# EAGLE board PCB (EAGLE 9.7.0)
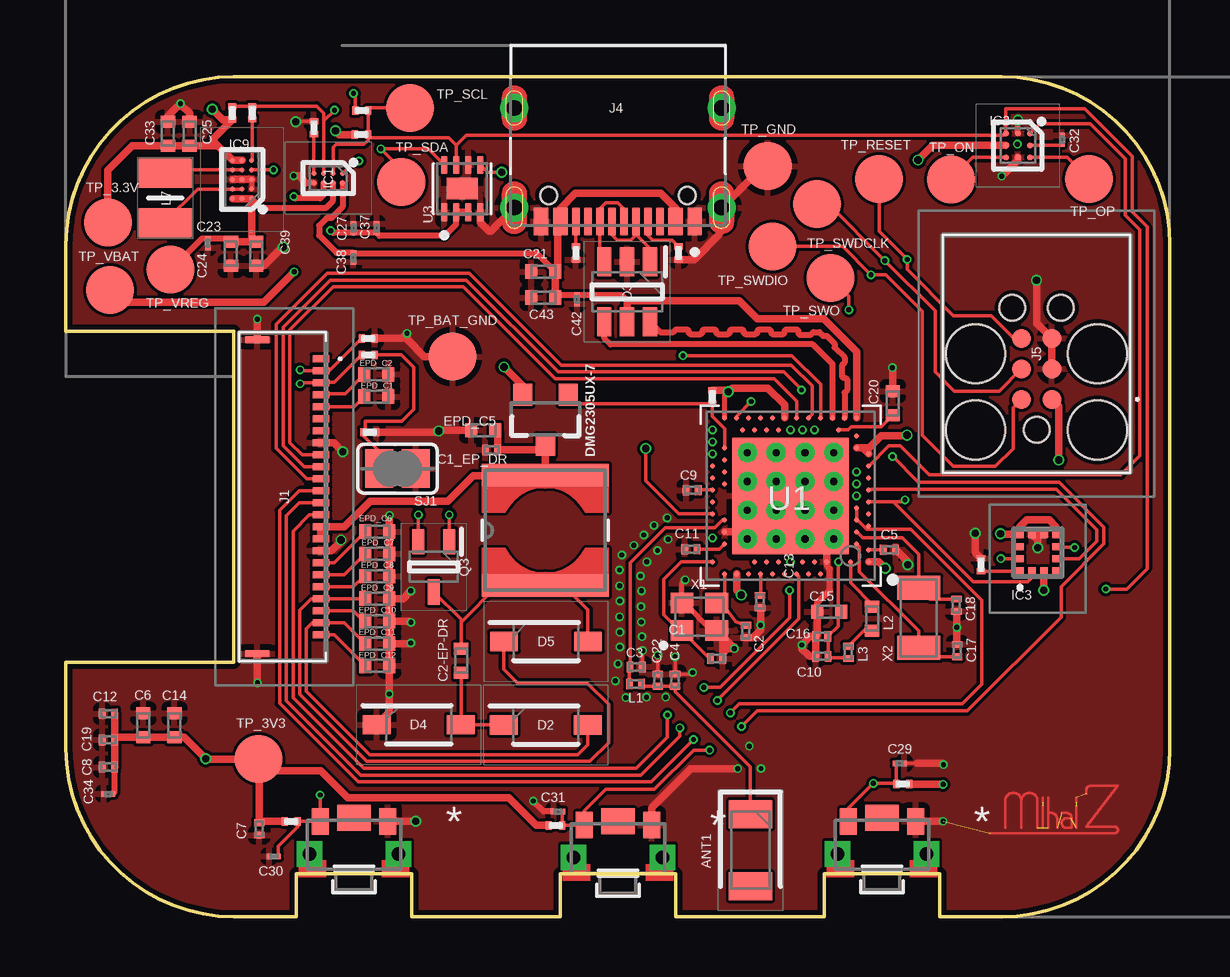
[diagram p0: board, top side]
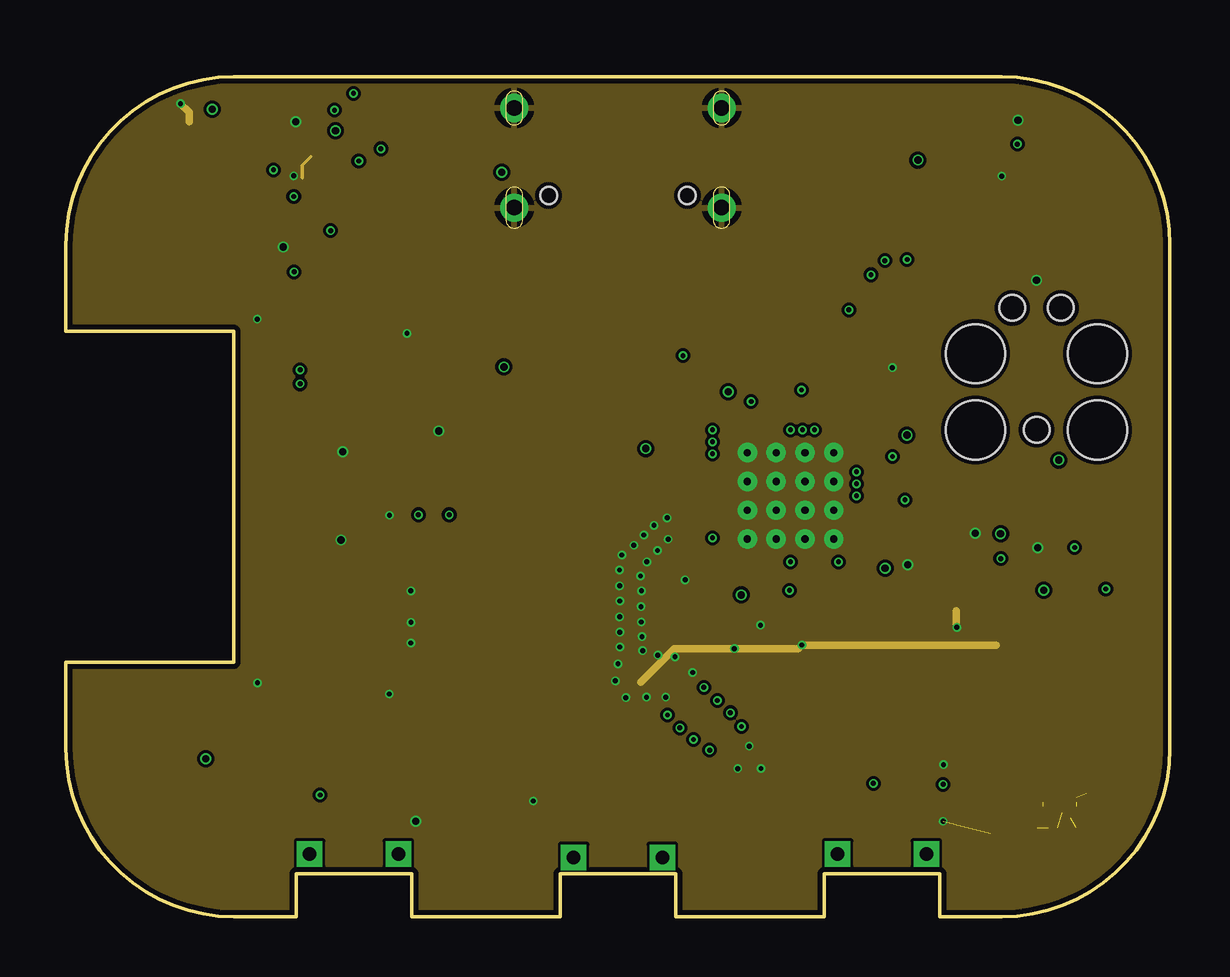
[diagram p1: board, inner layer Route2]
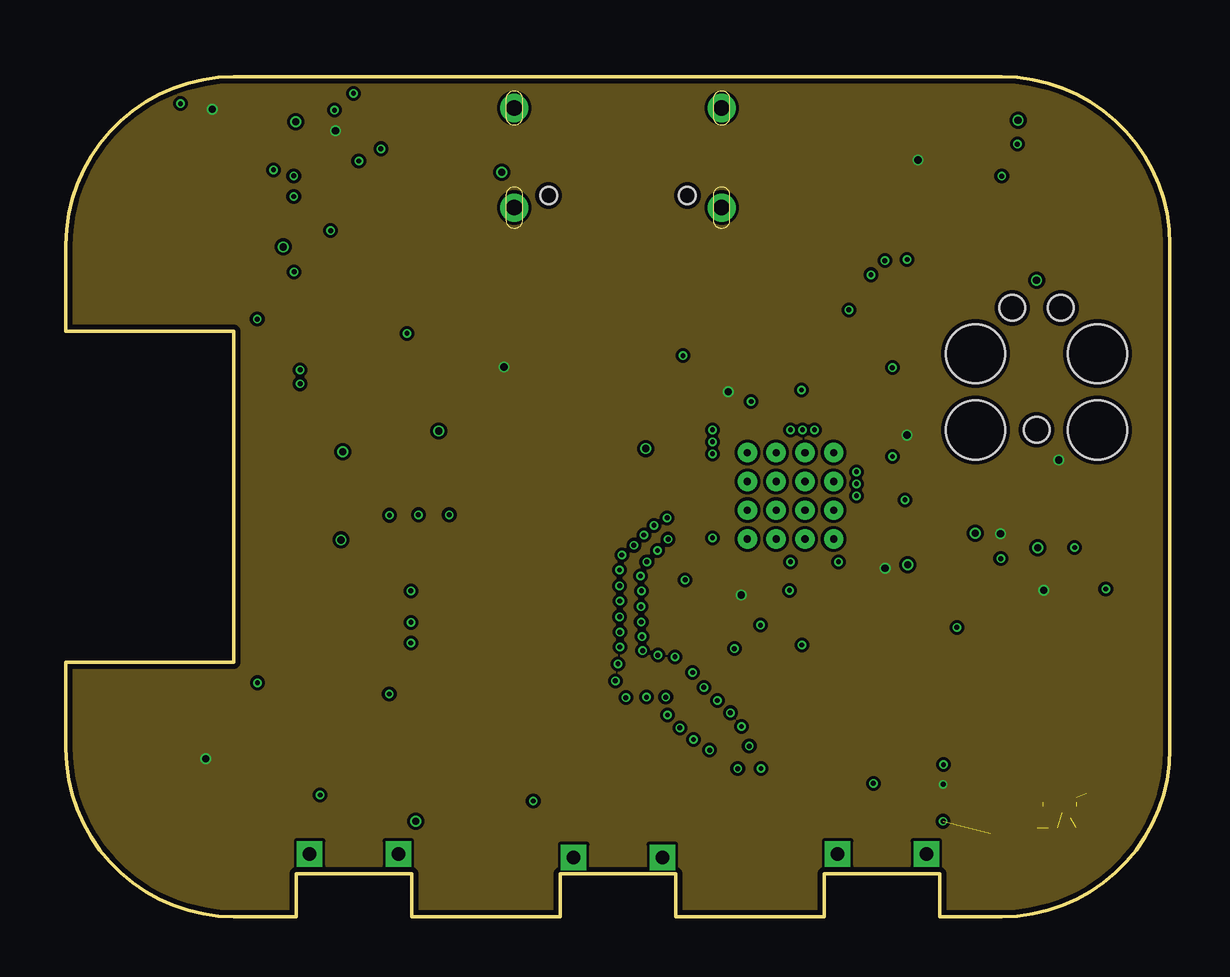
[diagram p2: board, inner layer Route15]
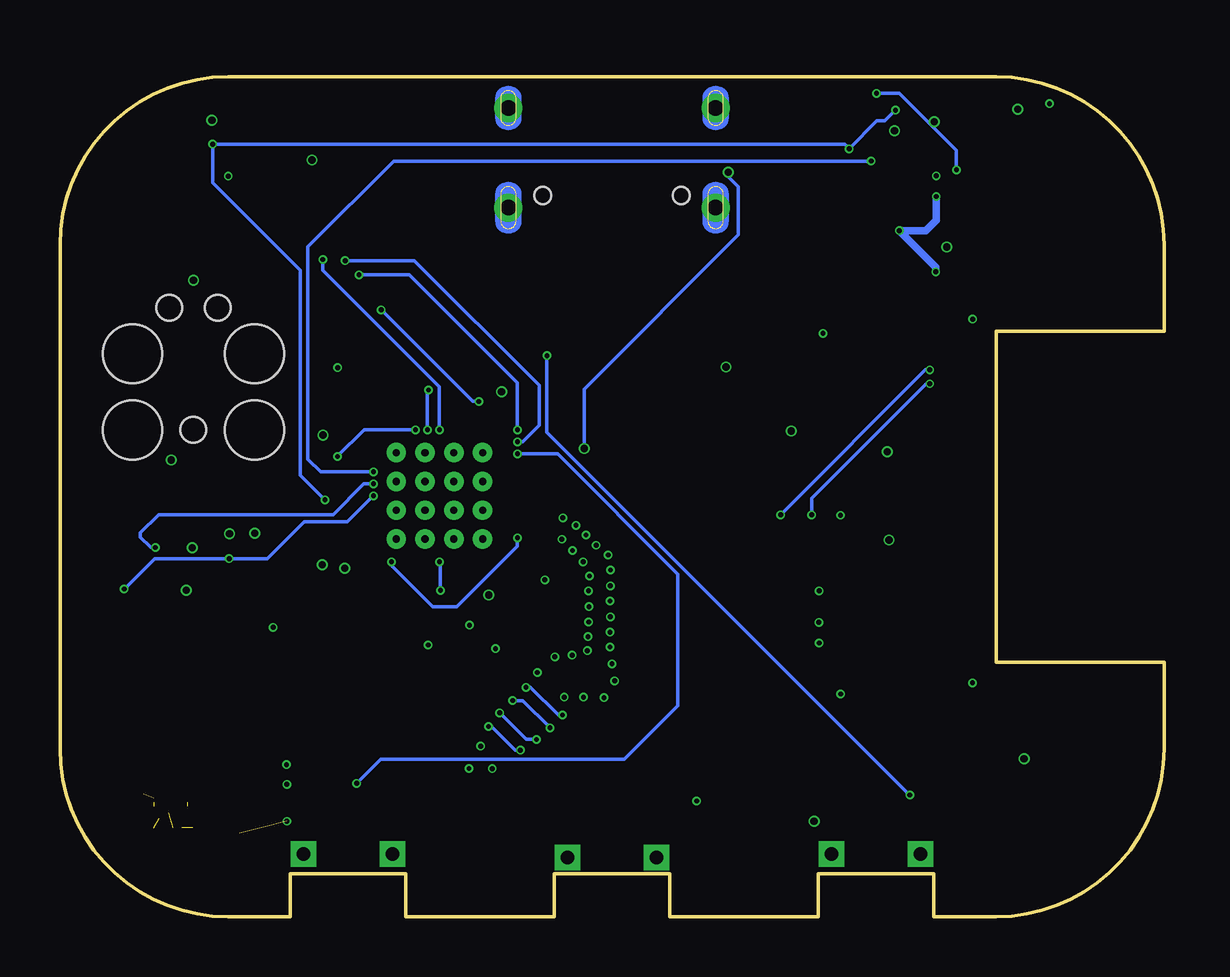
[diagram p3: board, bottom side, seen from below]

Size 46 x 35 mm. Coordinates in mm from the lower left corner, seen from the top.
Outline: 39,0 36.4,0 36.4,1.8 31.6,1.8 31.6,0 25.4,0 25.4,1.8 20.6,1.8 20.6,0 14.4,0 14.4,1.8 9.6,1.8 9.6,0 7,0 arc-90 0,7 0,10.6 7,10.6 7,24.4 0,24.4 0,28 arc-90 7,35 39,35 arc-90 46,28 46,7 arc-90 39,0
Copper layers (1+2*15+16): Top 0.035mm / dielectric 1.6mm / Route2 0.035mm / dielectric 0.15mm / Route15 0.035mm / dielectric 0.2mm / Bottom 0.035mm
Design rules "jlcpcb-2layers.dru *": minimum track width 5mil, minimum drill 0.2mm, track to track 5mil, track to pad 5mil, pad to pad 5mil, via to via 5mil, smd to smd 5mil, copper to edge 0.2mm, drill to drill 6mil, minimum pad ring 10mil, minimum via ring 3mil, stop-mask expansion 4mil, vias tented up to drill 999mm, thermal gap 10mil

## Footprints (pad centres in the part's own frame; a part is rotated, then mirrored left to right if it is on the bottom)
2450AT18B100E_ANTC3216X140N = smd 1.15 x 1.8: 1 -1.5,0; 2 1.5,0
NORDIC_NRF_3_RESC0201_L = smd 0.28 x 0.43: 1 -0.255,0; 2 0.255,0
NORDIC_NRF_3_RESC0402_L = smd 0.5 x 0.6: 1 -0.5,0; 2 0.5,0
GRM011R60J152KE01L_2_CAPC0201X13N = smd 0.22 x 0.23: 1 -0.185,0; 2 0.185,0
ESP32_C6_LIBRARY_5_SOD3716X135N = smd 1.15 x 0.8: 1 -1.75,0; 2 1.75,0
ESP32_C6_LIBRARY_3_SOT95P280X145-6N = smd 1.2 x 0.6: 1 -1.25,0.95; 2 -1.25,0; 3 -1.25,-0.95; 4 1.25,-0.95; 5 1.25,0; 6 1.25,0.95
ESP32_C6_LIBRARY_4_ESP32_C6_LIBRARY_4_ESP32_C6_LIBRARY_4_ESP32_C6_LIBRARY_4_ESP32_WROVER_SPARKFUN-DISCRETESEMI_SOT23-3 = smd 0.8 x 0.9: 1 -0.95,-1; 2 0.95,-1; 3 0,1.1
BQ25180YBGR_BGA8C40P2X4_100X155X50 = smd 0.2 x 0.2: A1 -0.2,0.6; A2 0.2,0.6; B1 -0.2,0.2; B2 0.2,0.2; C1 -0.2,-0.2; C2 0.2,-0.2; D1 -0.2,-0.6; D2 0.2,-0.6
DRV2605YZFR_BGA9C50P3X3_144X144X62 = smd 0.25 x 0.25: A1 -0.5,0.5; A2 0,0.5; A3 0.5,0.5; B1 -0.5,0; B2 0,0; B3 0.5,0; C1 -0.5,-0.5; C2 0,-0.5; C3 0.5,-0.5
BMA423_BMA423 = smd 0.3 x 0.35: 1 -0.75,-0.775; 2 -0.25,-0.775; 3 0.25,-0.775; 4 0.75,-0.775; 7 0.75,0.775; 8 0.25,0.775; 9 -0.25,0.775; 10 -0.75,0.775 | smd 0.35 x 0.3: 5 0.775,-0.25; 6 0.775,0.25; 11 -0.775,0.25; 12 -0.775,-0.25
RT6160AWSC_BGA15C40P3X5_140X230X60 = smd 0.216 x 0.216: A1 -0.4,0.8; A2 0,0.8; A3 0.4,0.8; B1 -0.4,0.4; B2 0,0.4; B3 0.4,0.4; C1 -0.4,0; C2 0,0; C3 0.4,0; D1 -0.4,-0.4; D2 0,-0.4; D3 0.4,-0.4; E1 -0.4,-0.8; E2 0,-0.8; E3 0.4,-0.8
503480-2400_5034802400 = smd 0.3 x 0.7: 1 -5.75,1.525; 2 -5.25,1.525; 3 -4.75,1.525; 4 -4.25,1.525; 5 -3.75,1.525; 6 -3.25,1.525; 7 -2.75,1.525; 8 -2.25,1.525; 9 -1.75,1.525; 10 -1.25,1.525; 11 -0.75,1.525; 12 -0.25,1.525; 13 0.25,1.525; 14 0.75,1.525; 15 1.25,1.525; 16 1.75,1.525; 17 2.25,1.525; 18 2.75,1.525; 19 3.25,1.525; 20 3.75,1.525; 21 4.25,1.525; 22 4.75,1.525; 23 5.25,1.525; 24 5.75,1.525 | smd 0.3 x 1: MP1 -6.54,-1.125; MP2 6.54,-1.125
KH-TYPE-C-16P_KINGHELM_KH-TYPE-C-16P = smd 0.6 x 1.15: A1_B12 -3.2,4.725; A4_B9 -2.4,4.725; A9_B4 2.4,4.725; A12_B1 3.2,4.725 | smd 0.3 x 1.15: A5 -1.25,4.725; A6 -0.25,4.725; A7 0.25,4.725; A8 1.25,4.725; B5 1.75,4.725; B6 0.75,4.725; B7 -0.75,4.725; B8 -1.75,4.725 | drill 0.65 pad 1.05: SH1 -4.32,0; SH2 4.32,0; SH3 -4.32,4.15; SH4 4.32,4.15 | hole 0.7: -2.89,3.65; 2.89,3.65
TC2030-IDC_TC2030IDC = smd 0.783 x 0.783: 1 -0.953,-0.635; 2 -0.953,0.635; 3 0.317,-0.635; 4 0.317,0.635; 5 1.588,-0.635; 6 1.588,0.635 | hole 2.451: -2.223,-2.54; -2.223,2.54; 0.952,-2.54; 0.952,2.54 | hole 1.067: -2.223,0; 2.857,-1.016; 2.857,1.016
NORDIC_NRF_2_RESC0201_L = smd 0.28 x 0.43: 1 -0.255,0; 2 0.255,0
NORDIC_NRF_2_RESC0402_L = smd 0.5 x 0.6: 1 -0.5,0; 2 0.5,0
ESP32_C6_LIBRARY_2_IND_4828-WE-TPC_WRE = smd 0.9 x 5.3: 1 -2.286,0; 2 2.286,0
MLP2016SR47MT0S1_INDC2016X100N = smd 1.2 x 2.2: 1 -1.028,0; 2 1.028,0
ESP32_C6_LIBRARY_6_SOT65P210X110-3N = smd 1.05 x 0.5: 1 -1.05,0.65; 2 -1.05,-0.65; 3 1.05,0
CPF0201D7K68C1_0201 = smd 0.35 x 0.25: 1 0,0.275; 2 0,-0.275
ESP32_C6_LIBRARY_7_JUMPER_SJ = smd 1.168 x 1.6: 1 -0.762,0; 2 0.762,0
2025-10-22_07-23-44_LIBRARY_SW_EVP-AKE31A_PAN = smd 0.711 x 1.092: 1 -1.4,-0.972; 2 1.4,-0.972 | drill 0.559 pad 0.914 square: 3 -1.848,0.381; 4 1.848,0.381 | smd 1.397 x 1.092: 5 0,-1.124
HECTOR_WATCH_1_TP20R = smd 2 x 2: TP 0,0
NORDIC_NRF_4_AQFN50P700X700X85_HS-74N = smd 4.85 x 4.85: P$74 0,0 | drill 0.3 pad 0.6: P$75 -1.8,1.8; P$76 -0.6,1.8; P$77 0.6,1.8; P$78 1.8,1.8; P$79 -1.8,0.6; P$80 -0.6,0.6; P$81 0.6,0.6; P$82 1.8,0.6; P$83 -1.8,-0.6; P$84 -0.6,-0.6; P$85 0.6,-0.6; P$86 1.8,-0.6; P$87 -1.8,-1.8; P$88 -0.6,-1.8; P$89 0.6,-1.8; P$90 1.8,-1.8 | smd 0.2 x 0.2: P$A8 -1.25,3.25; P$A10 -0.75,3.25; P$A12 -0.25,3.25; P$A14 0.25,3.25; P$A16 0.75,3.25; P$A18 1.25,3.25; P$A20 1.75,3.25; P$A22 2.25,3.25; P$A23 2.75,3.25; P$AA24 3.25,-2.25; P$AB2 -2.75,-2.5; P$AC5 -2,-2.75; P$AC9 -1,-2.75; P$AC11 -0.5,-2.75; P$AC13 0,-2.75; P$AC15 0.5,-2.75; P$AC17 1,-2.75; P$AC19 1.5,-2.75; P$AC21 2,-2.75; P$AC24 3.25,-2.75; P$AD2 -2.75,-3.25; P$AD4 -2.25,-3.25; P$AD6 -1.75,-3.25; P$AD8 -1.25,-3.25; P$AD10 -0.75,-3.25; P$AD12 -0.25,-3.25; P$AD14 0.25,-3.25; P$AD16 0.75,-3.25; P$AD18 1.25,-3.25; P$AD20 1.75,-3.25; P$AD22 2.25,-3.25; P$AD23 2.75,-3.25; P$B1 -3.25,2.75; P$B3 -2.5,2.75; P$B5 -2,2.75; P$B7 -1.5,2.75; P$B9 -1,2.75; P$B11 -0.5,2.75; P$B13 0,2.75; P$B15 0.5,2.75; P$B17 1,2.75; P$B19 1.5,2.75; P$B24 3.25,2.75; P$C1 -3.25,2.25; P$D2 -2.75,2; P$D23 2.75,2; P$E24 3.25,1.75; P$F2 -2.75,1.5; P$F23 2.75,1.5; P$G1 -3.25,1.25; P$H2 -2.75,1; P$H23 2.75,1; P$J1 -3.25,0.75; P$J24 3.25,0.75; P$K2 -2.75,0.5; P$L1 -3.25,0.25; P$L24 3.25,0.25; P$M2 -2.75,0; P$N1 -3.25,-0.25; P$N24 3.25,-0.25; P$P2 -2.75,-0.5; P$P23 2.75,-0.5; P$R1 -3.25,-0.75; P$R24 3.25,-0.75; P$T2 -2.75,-1; P$T23 2.75,-1; P$U1 -3.25,-1.25; P$U24 3.25,-1.25; P$V23 2.75,-1.5; P$W1 -3.25,-1.75; P$W24 3.25,-1.75; P$Y2 -2.75,-2; P$Y23 2.75,-2
ESP32_C6_LIBRARY_SON50P200X200X80-9N = smd 0.76 x 0.27: 1 -0.985,0.75; 2 -0.985,0.25; 3 -0.985,-0.25; 4 -0.985,-0.75; 5 0.985,-0.75; 6 0.985,-0.25; 7 0.985,0.25; 8 0.985,0.75 | smd 0.9 x 1.3: 9 0,0
NORDIC_NRF_BT-XTAL_2016_N = smd 0.95 x 0.85: 1 -0.725,-0.575; 2 0.725,-0.575; 3 0.725,0.575; 4 -0.725,0.575
NORDIC_NRF_1_XTAL_3215_N = smd 1 x 1.8: 1 -1.25,0; 2 1.25,0

## Placement (x,y rotation side)
ANT1  2450AT18B100E_2450AT18B100E  [2450AT18B100E_ANTC3216X140N]  28.52,2.77 270 top
C1  12pF  [NORDIC_NRF_3_RESC0201_L]  27.11,10.76 0 top
C1_EP_DR  10uF  [NORDIC_NRF_3_RESC0402_L]  17.38,20.27 180 top
C2  12pF  [NORDIC_NRF_3_RESC0201_L]  28.33,11.89 270 top
C2-EP-DR  4.7uF/25V  [NORDIC_NRF_3_RESC0402_L]  16.46,10.66 90 top
C3  1pF  [NORDIC_NRF_3_RESC0201_L]  23.76,10.41 0 top
C4  1pF  [NORDIC_NRF_3_RESC0201_L]  25.38,9.86 90 top
C5  100nF  [NORDIC_NRF_3_RESC0201_L]  34.31,15.29 0 top
C6  4.7uF  [NORDIC_NRF_3_RESC0402_L]  3.22,7.98 90 top
C7  100nF  [NORDIC_NRF_3_RESC0201_L]  8.05,3.66 270 top
C8  100nF  [NORDIC_NRF_3_RESC0201_L]  1.77,6.24 180 top
C9  820pF (N.C.)  [NORDIC_NRF_3_RESC0201_L]  26.09,17.77 180 top
C10  N.C.  [NORDIC_NRF_3_RESC0201_L]  31.5,10.85 180 top
C11  100pF  [NORDIC_NRF_3_RESC0201_L]  26.04,15.31 180 top
C12  100nF  [NORDIC_NRF_3_RESC0201_L]  1.77,8.46 180 top
C13  N.C.  [NORDIC_NRF_3_RESC0201_L]  28.92,13.13 270 top
C14  4.7uF  [NORDIC_NRF_3_RESC0402_L]  4.52,7.98 90 top
C15  1uF  [NORDIC_NRF_3_RESC0402_L]  31.81,12.71 180 top
C16  47nF  [NORDIC_NRF_3_RESC0201_L]  31.49,11.68 180 top
C17  12pF  [NORDIC_NRF_3_RESC0201_L]  37.14,11.09 270 top
C18  12pF  [NORDIC_NRF_3_RESC0201_L]  37.1,12.98 90 top
C19  100nF  [NORDIC_NRF_3_RESC0201_L]  1.77,7.37 180 top
C20  4.7uF  [NORDIC_NRF_3_RESC0402_L]  34.45,21.4 90 top
C21  4.7uF  [NORDIC_NRF_3_RESC0402_L]  19.89,26.88 180 top
C22  N.C.  [NORDIC_NRF_3_RESC0201_L]  24.66,9.86 90 top
C23  0.1uF  [GRM011R60J152KE01L_2_CAPC0201X13N]  5.91,28.07 270 top
C24  10uF  [NORDIC_NRF_3_RESC0402_L]  6.87,27.62 90 top
C25  22uF  [NORDIC_NRF_3_RESC0402_L]  5.15,32.63 90 top
C27  0.1uF  [GRM011R60J152KE01L_2_CAPC0201X13N]  11.98,28.69 90 top
C29  1uF  [GRM011R60J152KE01L_2_CAPC0201X13N]  34.74,6.39 0 top
C30  1uF  [GRM011R60J152KE01L_2_CAPC0201X13N]  8.66,2.52 180 top
C31  1uF  [GRM011R60J152KE01L_2_CAPC0201X13N]  20.5,4.39 180 top
C32  1uF  [GRM011R60J152KE01L_2_CAPC0201X13N]  41.5,32.38 90 top
C33  22uF  [NORDIC_NRF_3_RESC0402_L]  4.25,32.62 90 top
C34  0.1uF  [GRM011R60J152KE01L_2_CAPC0201X13N]  1.76,5.12 180 top
C37  1uF  [GRM011R60J152KE01L_2_CAPC0201X13N]  12.94,28.69 90 top
C38  1uF  [GRM011R60J152KE01L_2_CAPC0201X13N]  11.98,27.47 270 top
C39  10uF  [NORDIC_NRF_3_RESC0402_L]  7.93,27.62 270 top
C42  0.1uF  [GRM011R60J152KE01L_2_CAPC0201X13N]  21.3,25.73 270 top
C43  4.7uF  [NORDIC_NRF_3_RESC0402_L]  19.89,25.8 180 top
D2  MBR0530  [ESP32_C6_LIBRARY_5_SOD3716X135N]  19.99,7.99 0 top
D3  USBLC6-2SC6Y  [ESP32_C6_LIBRARY_3_SOT95P280X145-6N]  23.38,26.04 270 top
D4  MBR0530  [ESP32_C6_LIBRARY_5_SOD3716X135N]  14.7,8 0 top
D5  MBR0530  [ESP32_C6_LIBRARY_5_SOD3716X135N]  20,11.47 0 top
DMG2305UX-7  20V/4.2A/52mΩ/1.4W  [ESP32_C6_LIBRARY_4_ESP32_C6_LIBRARY_4_ESP32_C6_LIBRARY_4_ESP32_C6_LIBRARY_4_ESP32_WROVER_SPARKFUN-DISCRETESEMI_SOT23-3]  19.98,20.75 180 top
EPD_C1  1uF/50V  [NORDIC_NRF_3_RESC0402_L]  12.93,21.67 180 top
EPD_C2  1uF/50V  [NORDIC_NRF_3_RESC0402_L]  12.93,22.6 180 top
EPD_C5  0.1uF/50V  [NORDIC_NRF_3_RESC0201_L]  17.73,19.45 0 top
EPD_C6  1uF/50V  [NORDIC_NRF_3_RESC0402_L]  12.97,16.05 180 top
EPD_C7  1uF/50V  [NORDIC_NRF_3_RESC0402_L]  12.97,15.12 180 top
EPD_C8  1uF/50V  [NORDIC_NRF_3_RESC0402_L]  12.97,14.19 180 top
EPD_C9  1uF/50V  [NORDIC_NRF_3_RESC0402_L]  12.97,13.26 180 top
EPD_C10  1uF/50V  [NORDIC_NRF_3_RESC0402_L]  12.97,12.32 180 top
EPD_C11  1uF/50V  [NORDIC_NRF_3_RESC0402_L]  12.97,11.38 180 top
EPD_C12  1uF/50V  [NORDIC_NRF_3_RESC0402_L]  12.97,10.45 180 top
IC1  BQ25180YBGR_BQ25180YBGR  [BQ25180YBGR_BGA8C40P2X4_100X155X50]  10.93,30.78 270 top
IC2  DRV2605YZFR_DRV2605YZFR  [DRV2605YZFR_BGA9C50P3X3_144X144X62]  39.66,32.14 270 top
IC3  BMA423_BMA423  [BMA423_BMA423]  40.5,15.17 0 top
IC9  RT6160AWSC_RT6160AWSC  [RT6160AWSC_BGA15C40P3X5_140X230X60]  7.34,30.72 180 top
J1  503480-2400_503480-2400  [503480-2400_5034802400]  9.1,17.5 270 top
J4  KH-TYPE-C-16P  [KH-TYPE-C-16P_KINGHELM_KH-TYPE-C-16P]  23,33.7 180 top
J5  TC2030-IDC_TC2030-IDC  [TC2030-IDC_TC2030IDC]  40.44,22.51 90 top
L1  3.9nH  [NORDIC_NRF_2_RESC0201_L]  23.73,9.7 0 top
L2  10uH  [NORDIC_NRF_2_RESC0402_L]  33.59,12.42 270 top
L3  15nH  [NORDIC_NRF_2_RESC0201_L]  32.6,11.02 270 top
L5  68uH  [ESP32_C6_LIBRARY_2_IND_4828-WE-TPC_WRE]  19.97,16.1 90 top
L7  MLP2016SR47MT0S1_FTC252012SR47MBCA  [MLP2016SR47MT0S1_INDC2016X100N]  4.14,29.95 90 top
Q3  SI1308EDL-T1-GE3  [ESP32_C6_LIBRARY_6_SOT65P210X110-3N]  15.32,14.58 270 top
R1_EP_DR  0.47  [CPF0201D7K68C1_0201]  12.59,23.41 270 top
R1_USB  5K1  [CPF0201D7K68C1_0201]  25.52,27.66 180 top
R2  0  [CPF0201D7K68C1_0201]  7.76,33.5 180 top
R2_EP_DR  10K  [CPF0201D7K68C1_0201]  12.6,24.1 270 top
R2_USB  5K1  [CPF0201D7K68C1_0201]  21.25,27.66 0 top
R3  0  [CPF0201D7K68C1_0201]  38.12,14.67 180 top
R4  0  [CPF0201D7K68C1_0201]  12.32,33.59 90 top
R5  10K  [CPF0201D7K68C1_0201]  9.39,3.97 270 top
R7  10K  [CPF0201D7K68C1_0201]  34.86,5.53 90 top
R8  10K  [CPF0201D7K68C1_0201]  20.4,3.81 270 top
R9  10K  [CPF0201D7K68C1_0201]  10.33,32.87 0 top
R17  3K3  [CPF0201D7K68C1_0201]  12.31,32.59 90 top
R18  3K3  [CPF0201D7K68C1_0201]  6.93,33.49 180 top
R_PWR_EPD  10K  [CPF0201D7K68C1_0201]  26.93,21.66 180 top
R_TYPE_SEL  2.2  [CPF0201D7K68C1_0201]  12.66,20.19 270 top
SJ1  SJ  [ESP32_C6_LIBRARY_7_JUMPER_SJ]  13.81,18.67 180 top
SW_DN  2025-10-22_07-23-44_LIBRARY_EVP-AKE31ASW_EVP-AKE31A_PAN  [2025-10-22_07-23-44_LIBRARY_SW_EVP-AKE31A_PAN]  34,3 180 top
SW_ENT  2025-10-22_07-23-44_LIBRARY_EVP-AKE31ASW_EVP-AKE31A_PAN  [2025-10-22_07-23-44_LIBRARY_SW_EVP-AKE31A_PAN]  23,2.85 180 top
SW_UP  2025-10-22_07-23-44_LIBRARY_EVP-AKE31ASW_EVP-AKE31A_PAN  [2025-10-22_07-23-44_LIBRARY_SW_EVP-AKE31A_PAN]  12,3 180 top
TP_3.3V  HECTOR_WATCH_1_TPTP20R  [HECTOR_WATCH_1_TP20R]  1.75,28.93 0 top
TP_3V3  HECTOR_WATCH_1_TPTP20R  [HECTOR_WATCH_1_TP20R]  8.03,6.57 0 top
TP_BAT_GND  HECTOR_WATCH_1_TPTP20R  [HECTOR_WATCH_1_TP20R]  16.11,23.34 0 top
TP_GND  HECTOR_WATCH_1_TPTP20R  [HECTOR_WATCH_1_TP20R]  29.24,31.28 0 top
TP_ON  HECTOR_WATCH_1_TPTP20R  [HECTOR_WATCH_1_TP20R]  36.87,30.72 0 top
TP_OP  HECTOR_WATCH_1_TPTP20R  [HECTOR_WATCH_1_TP20R]  42.62,30.74 0 top
TP_RESET  HECTOR_WATCH_1_TPTP20R  [HECTOR_WATCH_1_TP20R]  33.88,30.75 0 top
TP_SCL  HECTOR_WATCH_1_TPTP20R  [HECTOR_WATCH_1_TP20R]  14.34,33.7 0 top
TP_SDA  HECTOR_WATCH_1_TPTP20R  [HECTOR_WATCH_1_TP20R]  13.97,30.62 0 top
TP_SWDCLK  HECTOR_WATCH_1_TPTP20R  [HECTOR_WATCH_1_TP20R]  31.3,29.7 0 top
TP_SWDIO  HECTOR_WATCH_1_TPTP20R  [HECTOR_WATCH_1_TP20R]  29.44,27.92 0 top
TP_SWO  HECTOR_WATCH_1_TPTP20R  [HECTOR_WATCH_1_TP20R]  31.86,26.61 0 top
TP_VBAT  HECTOR_WATCH_1_TPTP20R  [HECTOR_WATCH_1_TP20R]  1.84,26.11 0 top
TP_VREG  HECTOR_WATCH_1_TPTP20R  [HECTOR_WATCH_1_TP20R]  4.35,26.97 0 top
U1  NORDIC_NRF_4_NRF52840_QF  [NORDIC_NRF_4_AQFN50P700X700X85_HS-74N]  30.19,17.54 180 top
U3  MAX17048G+T10  [ESP32_C6_LIBRARY_SON50P200X200X80-9N]  16.51,30.34 90 top
X1  32MHz  [NORDIC_NRF_BT-XTAL_2016_N]  26.39,12.5 0 top
X2  32.768kHz  [NORDIC_NRF_1_XTAL_3215_N]  35.53,12.45 270 top

## Library data of the parts
ANT1 = InkTime_v5; ARROW_PART_NUMBER: 2450AT18B100E; ARROW_PRICE-STOCK: https://www.arrow.com/en/products/2450at18b100e/johanson-dielectrics?utm_currency=USD&region=nac; DESCRIPTION: Antennas 2.45GHz ANTENNA; HEIGHT: 1.4mm; MANUFACTURER_NAME: JOHANSON TECHNOLOGY; MANUFACTURER_PART_NUMBER: 2450AT18B100E; MOUSER_PART_NUMBER: 609-2450AT18B100E; MOUSER_PRICE-STOCK: https://www.mouser.co.uk/ProductDetail/Johanson-Technology/2450AT18B100E?qs=yCnrNFeXz%252Bh5MFsFIXGZGA%3D%3D
C1 C1_EP_DR C2 C2-EP-DR C3-C22 C24 C25 C33 C39 C43 EPD_C1 EPD_C2 EPD_C5-EPD_C12 L1-L3 R1_EP_DR R1_USB R2 R2_EP_DR R2_USB R3-R5 R7-R9 R17 R18 R_PWR_EPD R_TYPE_SEL SJ1 TP_3.3V TP_3V3 TP_BAT_GND TP_GND TP_ON TP_OP TP_RESET TP_SCL TP_SDA TP_SWDCLK TP_SWDIO TP_SWO TP_VBAT TP_VREG U1 X1 X2 = InkTime_v5
C23 C27 C29-C32 C34 C37 C38 C42 = InkTime_v5; AVAILABILITY: In Stock; CHECK_PRICES: https://www.snapeda.com/parts/GRM011R60J152KE01L/Murata/view-part/?ref=eda; DESCRIPTION: SMD Capacitor X5R(EIA) with Capacitance: 1500pF Tol. 10%. Rated Voltage: 6.3Vdc; MF: Murata; MP: GRM011R60J152KE01L; PACKAGE: 0201 Murata; PRICE: None; SNAPEDA_LINK: https://www.snapeda.com/parts/GRM011R60J152KE01L/Murata/view-part/?ref=snap
D2 D4 D5 = InkTime_v5; AVAILABILITY: In Stock; CHECK_PRICES: https://www.snapeda.com/parts/MBR0530/Onsemi/view-part/?ref=eda; DESCRIPTION: Diode Schottky 30 V 500mA Surface Mount SOD-123; MF: ON Semiconductor; MP: MBR0530; PACKAGE: SOD-123-2 ON Semiconductor; PRICE: None; PURCHASE-URL: https://www.snapeda.com/api/url_track_click_mouser/?unipart_id=179458&manufacturer=ON Semiconductor&part_name=MBR0530&search_term=None; SNAPEDA_LINK: https://www.snapeda.com/parts/MBR0530/Onsemi/view-part/?ref=snap
D3 = InkTime_v5; AVAILABILITY: In Stock; CHECK_PRICES: https://www.snapeda.com/parts/USBLC6-2SC6Y/STMicroelectronics/view-part/?ref=eda; DESCRIPTION: 17V Clamp 5A (8/20µs) Ipp Tvs Diode Surface Mount SOT-23-6; MF: STMicroelectronics; MP: USBLC6-2SC6Y; PACKAGE: SOT-23-6 STMicroelectronics; PRICE: None; SNAPEDA_LINK: https://www.snapeda.com/parts/USBLC6-2SC6Y/STMicroelectronics/view-part/?ref=snap
DMG2305UX-7 = InkTime_v5; PROD_ID: TRAN-14388
IC1 = InkTime_v5; ARROW_PART_NUMBER: BQ25180YBGR; ARROW_PRICE-STOCK: https://www.arrow.com/en/products/bq25180ybgr/texas-instruments?utm_currency=USD&region=nac; DESCRIPTION: Charger IC Lithium Ion/Polymer, Lithium Iron Phosphate 8-DSBGA (1.6x1.1); HEIGHT: 0.5mm; MANUFACTURER_NAME: Texas Instruments; MANUFACTURER_PART_NUMBER: BQ25180YBGR; MOUSER_PART_NUMBER: 595-BQ25180YBGR; MOUSER_PRICE-STOCK: https://www.mouser.co.uk/ProductDetail/Texas-Instruments/BQ25180YBGR?qs=doiCPypUmgEWjAK%252BJAX6Tw%3D%3D
IC2 = InkTime_v5; ARROW_PART_NUMBER: DRV2605YZFR; ARROW_PRICE-STOCK: https://www.arrow.com/en/products/drv2605yzfr/texas-instruments?region=nac; DESCRIPTION: Haptic Driver for ERM/LRA with Built-In Library and Smart Loop Architecture; HEIGHT: 0.625mm; MANUFACTURER_NAME: Texas Instruments; MANUFACTURER_PART_NUMBER: DRV2605YZFR
IC3 = InkTime_v5; ARROW_PART_NUMBER: BMA423; ARROW_PRICE-STOCK: https://www.arrow.com/en/products/bma423/bosch; DESCRIPTION: Accelerometers Triaxial low-g 12bit Acceleration Sensor; HEIGHT: 1mm; MANUFACTURER_NAME: BOSCH; MANUFACTURER_PART_NUMBER: BMA423; MOUSER_PART_NUMBER: 262-BMA423; MOUSER_PRICE-STOCK: https://www.mouser.co.uk/ProductDetail/Bosch-Sensortec/BMA423?qs=HXFqYaX1Q2xC%252BSgeGoX3mg%3D%3D
IC9 = InkTime_v5; DESCRIPTION: Buck-Boost Regulator Positive Output Step-Up/Step-Down I2C DC-DC Controller IC 15-WL-CSP (BSC) (1.4x2.3); HEIGHT: 0.6mm; MANUFACTURER_NAME: RICHTEK; MANUFACTURER_PART_NUMBER: RT6160AWSC; MOUSER_PART_NUMBER: 835-RT6160AWSC; MOUSER_PRICE-STOCK: https://www.mouser.co.uk/ProductDetail/Richtek/RT6160AWSC?qs=amGC7iS6iy%2FLd9PSoixZXQ%3D%3D
J1 = InkTime_v5; DESCRIPTION: FFC & FPC Connectors 0.5mm FPC RA SMT Dual Contact 24Ckt; HEIGHT: 1.87mm; MANUFACTURER_NAME: Molex; MANUFACTURER_PART_NUMBER: 503480-2400; MOUSER_PART_NUMBER: 538-503480-2400; MOUSER_PRICE-STOCK: https://www.mouser.co.uk/ProductDetail/Molex/503480-2400?qs=OAhjpuo3Vu7efIoxFh9AOw%3D%3D
J4 = InkTime_v5; AVAILABILITY: Not in stock; CHECK_PRICES: https://www.snapeda.com/parts/KH-TYPE-C-16P/Kinghelm/view-part/?ref=eda; MF: kinghelm; MP: KH-TYPE-C-16P; PACKAGE: None; PRICE: None; SNAPEDA_LINK: https://www.snapeda.com/parts/KH-TYPE-C-16P/Kinghelm/view-part/?ref=snap
J5 = InkTime_v5; DESCRIPTION: CABLE ADAPTER 6 POS; HEIGHT: 19mm; MANUFACTURER_NAME: Tag Connect; MANUFACTURER_PART_NUMBER: TC2030-IDC
L5 = InkTime_v5; COPYRIGHT: Copyright (C) 2024 Ultra Librarian. All rights reserved.; MANUFACTURER_PART_NUMBER: 744043680; MFR_NAME: Wurth Electronics
L7 = InkTime_v5; DESCRIPTION: SMD / SMT Inductors (Coils), L=0.47?H, L x W x T :; HEIGHT: 1mm; JLCPCB: https://jlcpcb.com/partdetail/6763488-FTC252012SR47MBCA/C5832368; MANUFACTURER_NAME: TDK; MANUFACTURER_PART_NUMBER: FTC252012SR47MBCA
Q3 = InkTime_v5; AVAILABILITY: In Stock; CHECK_PRICES: https://www.snapeda.com/parts/SI1308EDL-T1-GE3/Vishay+Siliconix/view-part/?ref=eda; DESCRIPTION: Si1308EDL-T1-GE3 N-channel MOSFET Transistor, 1.5 A, 30 V, 3-Pin SC-70 | Siliconix / Vishay SI1308EDL-T1-GE3; MF: Vishay Siliconix; MP: SI1308EDL-T1-GE3; PACKAGE: SOT-323 Vishay Semiconductor; PRICE: None; PURCHASE-URL: https://www.snapeda.com/api/url_track_click_mouser/?unipart_id=274603&manufacturer=Vishay Siliconix&part_name=SI1308EDL-T1-GE3&search_term=None; SNAPEDA_LINK: https://www.snapeda.com/parts/SI1308EDL-T1-GE3/Vishay+Siliconix/view-part/?ref=snap
SW_DN SW_ENT SW_UP = InkTime_v5; COPYRIGHT: Copyright (C) 2025 Ultra Librarian. All rights reserved.; DIGI-KEY_PART_NUMBER_1: P123437TR-ND; DIGI-KEY_PART_NUMBER_2: P123437CT-ND; DIGI-KEY_PART_NUMBER_3: P123437DKR-ND; MANUFACTURER_NAME: Panasonic; MANUFACTURER_PART_NUMBER: EVP-AKE31A
U3 = InkTime_v5; AVAILABILITY: In Stock; CHECK_PRICES: https://www.snapeda.com/parts/MAX17048G+T10/Analog+Devices/view-part/?ref=eda; DESCRIPTION: 3µA 1-Cell/2-Cell Fuel Gauge with ModelGauge; MF: Analog Devices; MP: MAX17048G+T10; PACKAGE: TDFN-8 Maxim; PRICE: None; PURCHASE-URL: https://www.snapeda.com/api/url_track_click_mouser/?unipart_id=329239&manufacturer=Analog Devices&part_name=MAX17048G+T10&search_term=None; SNAPEDA_LINK: https://www.snapeda.com/parts/MAX17048G+T10/Analog+Devices/view-part/?ref=snap

## Nets
3V3: C6.1 C7.1 C8.1 C12.1 C14.1 C19.1 C25.1 C33.1 C34.1 DMG2305UX-7.2 IC2.C2 IC3.3 IC3.7 IC3.10 IC9.E2 IC9.E3 J5.1 R5.2 R7.2 R8.2 R17.1 R18.1 R_PWR_EPD.2 TP_3.3V.TP TP_3V3.TP U1.P$A22 U1.P$AD14 U1.P$AD23 U1.P$B1 U1.P$W1 U1.P$Y2
ALERT: U1.P$J24 U3.5
D+: D3.4 U1.P$AD6
D-: D3.6 U1.P$AD4
DEC4_6: C10.1 C15.1 C16.1 L3.2 U1.P$B5 U1.P$E24
DN: D3.1 J4.A7 J4.B7
DP: D3.3 J4.A6 J4.B6
EPD_3V3: C1_EP_DR.1 DMG2305UX-7.3 EPD_C5.2 J1.15 J1.16 L5.2
EPD_BUSY: J1.9 U1.P$AD12
EPD_CS: J1.12 U1.P$K2
EPD_DC: J1.11 U1.P$AD10
EPD_RST: J1.10 U1.P$AC11
GDR: J1.2 Q3.1 R2_EP_DR.2
GND: C1.2 C1_EP_DR.2 C2.2 C3.2 C4.2 C5.2 C6.2 C7.2 C8.2 C9.2 C10.2 C11.2 C12.2 C13.2 C14.2 C15.2 C16.2 C17.1 C18.1 C19.2 C20.2 C21.2 C22.2 C23.2 C24.1 C25.2 C27.2 C29.2 C30.2 C31.2 C32.2 C33.2 C34.2 C37.2 C38.2 C39.2 C42.2 C43.2 D3.2 D4.1 EPD_C1.1 EPD_C2.1 EPD_C5.1 EPD_C6.1 EPD_C7.1 EPD_C8.1 EPD_C9.1 EPD_C10.1 EPD_C11.1 EPD_C12.1 IC1.D2 IC2.B1 IC2.B3 IC3.8 IC3.9 IC9.B1 IC9.C1 IC9.C2 IC9.C3 J1.8 J1.17 J1.MP1 J1.MP2 J4.A1_B12 J4.A12_B1 J4.SH1 J4.SH2 J4.SH3 J4.SH4 J5.3 J5.5 R1_USB.1 R2_EP_DR.1 R2_USB.2 R3.2 R9.1 R_TYPE_SEL.1 SJ1.1 SW_DN.1 SW_ENT.1 SW_UP.1 TP_BAT_GND.TP TP_GND.TP U1.P$74 U1.P$75 U1.P$76 U1.P$77 U1.P$78 U1.P$79 U1.P$80 U1.P$81 U1.P$82 U1.P$83 U1.P$84 U1.P$85 U1.P$86 U1.P$87 U1.P$88 U1.P$89 U1.P$90 U1.P$B7 U1.P$F23 U3.1 U3.4 U3.6 U3.9 X1.2 X1.4
HAPTIC_EN: IC2.A1 U1.P$U1
IMU_INT1: IC3.5 U1.P$N1
IMU_INT2: IC3.6 U1.P$P2
LX1: IC9.B2 IC9.B3 L7.1
LX2: IC9.D2 IC9.D3 L7.2
MOSI: J1.14 U1.P$B13
N$1: L2.2 L3.1
N$2: IC9.D1 R4.1
N$3: C32.1 IC2.A2
N$4: IC9.E1 R2.1
N$6: IC3.1 R3.1
N$7: C5.1 U1.P$C1
N$8: IC1.D1 R9.2
N$9: C2-EP-DR.1 D2.1 D4.2
N$10: EPD_C6.2 J1.18
N$11: R1_EP_DR.1 R_TYPE_SEL.2 SJ1.2
N$12: J4.A5 R1_USB.2
N$14: EPD_C2.2 J1.4
N$15: EPD_C1.2 J1.5
N$16: J4.B5 R2_USB.1
N$18: EPD_C7.2 J1.19
N$19: C2-EP-DR.2 D5.2 L5.1 Q3.3
N$20: C20.1 U1.P$AC5
N$21: EPD_C8.2 J1.20
N$22: EPD_C12.2 J1.24
N$24: EPD_C10.2 J1.22
N$40: L2.1 U1.P$B3
N$43: C13.1 U1.P$A18
N$58: C9.1 U1.P$N24
N$59: C11.1 U1.P$D23
N$60: C2.1 U1.P$A23 X1.3
N$61: C1.1 U1.P$B24 X1.1
N$62: C3.1 L1.1 U1.P$H23
N$63: ANT1.1 C4.1 C22.1 L1.2
OUT+: IC2.A3 TP_OP.TP
OUT-: IC2.C3 TP_ON.TP
P0.00/XL1: C17.2 U1.P$D2 X2.2
P0.00/XL2: C18.2 U1.P$F2 X2.1
P0.04: U1.P$J1
P0.09: U1.P$L24
P0.13: C30.1 R5.1 SW_UP.2 U1.P$AD8
P0.14: C31.1 R8.1 SW_ENT.2 U1.P$AC9
P0.19: U1.P$AC15
P0.20: U1.P$AD16
P0.21: U1.P$AC17
P0.22: U1.P$AD18
P0.23: U1.P$AC19
P0.24: U1.P$AD20
P0.25: U1.P$AC21
P0.26: U1.P$G1
P0.27: U1.P$H2
P0.28: U1.P$B11
P0.29: U1.P$A10
P0.30: U1.P$B9
P0.31: U1.P$A8
P1.01: DMG2305UX-7.1 R_PWR_EPD.1 U1.P$Y23
P1.02: C29.1 R7.1 SW_DN.2 U1.P$W24
P1.03: U1.P$V23
P1.04: U1.P$U24
P1.05: U1.P$T23
P1.06: U1.P$R24
P1.07: U1.P$P23
P1.09: U1.P$R1
P1.10: U1.P$A20
P1.11: U1.P$B19
P1.12: U1.P$B17
P1.13: U1.P$A16
P1.14: U1.P$B15
P1.15: U1.P$A14
PMIC_INT: IC1.A1 U1.P$T2
PREVGH: D5.1 EPD_C9.2 J1.21
PREVGL: D2.2 EPD_C11.2 J1.23
RESE: J1.3 Q3.2 R1_EP_DR.2
RESET: J5.6 TP_RESET.TP U1.P$AC13
SCK: J1.13 U1.P$A12
SCL: IC1.B1 IC2.C1 IC3.12 R4.2 R17.2 TP_SCL.TP U1.P$M2 U3.7
SDA: IC1.C1 IC2.B2 IC3.2 R2.2 R18.2 TP_SDA.TP U1.P$L1 U3.8
SWDCLK: J5.4 TP_SWDCLK.TP U1.P$AA24
SWDIO: J5.2 TP_SWDIO.TP U1.P$AC24
SWO: TP_SWO.TP U1.P$AD22
VBAT: C27.1 C37.1 IC1.C2 TP_VBAT.TP U3.2 U3.3
VBUS: C21.1 C38.1 C42.1 C43.1 D3.5 IC1.A2 J4.A4_B9 J4.A9_B4 U1.P$AD2
VREG: C23.1 C24.2 C39.1 IC1.B2 IC9.A1 IC9.A2 IC9.A3 TP_VREG.TP

## Tracks (layer width: path | path; a pad name or v marks a point on that pad's centre or on a via)
3V3  (via drill 0.2, 0.3)
  Top 0.203: U1.P$AD23 27.44,21.71 v27.6,21.87
  Top 0.254: C34.1 2.02,5.2 C8.1
  Top 0.305: IC9.E2 IC9.E3 6.33,32.13 | C8.1 C19.1 | C19.1 C12.1 | C19.1 2.14,7.48 C6.1 C14.1 4.93,7.48 v5.83,6.58 v5.84,6.57 TP_3V3.TP | R5.2 8.11,3.97 C7.1 8.05,6.55 TP_3V3.TP | TP_3.3V.TP 1.75,31.11 2.76,32.12 C33.1 C25.1 6.33,32.13 | v6.09,33.65 6.52,33.22 R18.1 6.14,32.42 6.14,32.33 6.33,32.13 | IC3.7 41.25,16.25 40.96,16.54 40.03,16.54 39.75,16.26 IC3.10 38.95,15.95 v38.94,15.96 | U1.P$Y2 33.19,19.54 | 33.19,19.54 U1.P$W1 | 33.19,19.54 33.48,19.54 33.98,20.04 35.01,20.04 v35.04,20.07 | TP_3V3.TP 8.52,6.08 10.62,6.08 11.74,4.96 18.44,4.96 19.59,3.81 R8.2 | U1.P$A22 27.94,13.61 v28.14,13.41 | DMG2305UX-7.2 19.03,22.13 v18.25,22.91 | R17.1 11.39,32.59 v11.23,32.75 | J5.1 41.36,21.27 v41.36,19.03 | IC2.C2 36.11,32.14 v35.5,31.53 | U1.P$B1 33.86,14.79 v34.13,14.52 | R_PWR_EPD.2 27.54,21.93 v27.6,21.87 27.76,22.03 29.24,22.03 29.94,21.33 U1.P$AD14 | IC3.3 v40.75,13.62 v40.74,13.61 | R7.2 v36.54,5.53 v36.55,5.52
  pour Route15: 31.56,1.86 31.58,1.88 36.42,1.88 36.44,1.86 36.46,1.84 36.48,1.82 36.48,0.08 39,0.08 39.78,0.12 40.54,0.25 41.29,0.46 42,0.76 42.68,1.14 43.32,1.59 43.9,2.1 44.41,2.68 44.86,3.32 45.24,4 45.54,4.71 45.75,5.46 45.88,6.22 45.92,7 45.92,28 45.88,28.78 45.75,29.54 45.54,30.29 45.24,31 44.86,31.68 44.41,32.32 43.9,32.9 43.32,33.41 42.68,33.86 42,34.24 41.29,34.54 40.54,34.75 39.78,34.88 39,34.92 7,34.92 6.22,34.88 5.46,34.75 4.71,34.54 4,34.24 3.32,33.86 2.68,33.41 2.1,32.9 1.59,32.32 1.14,31.68 0.76,31 0.46,30.29 0.25,29.54 0.12,28.78 0.08,28 0.08,24.48 7.02,24.48 7.04,24.46 7.06,24.44 7.08,24.42 7.08,10.58 7.06,10.56 7.04,10.54 7.02,10.52 0.08,10.52 0.08,7 0.12,6.22 0.25,5.46 0.46,4.71 0.76,4 1.14,3.32 1.59,2.68 2.1,2.1 2.68,1.59 3.32,1.14 4,0.76 4.71,0.46 5.46,0.25 6.22,0.12 7,0.08 9.52,0.08 9.52,1.82 9.54,1.84 9.56,1.86 9.58,1.88 14.42,1.88 14.44,1.86 14.46,1.84 14.48,1.82 14.48,0.08 20.52,0.08 20.52,1.82 20.54,1.84 20.56,1.86 20.58,1.88 25.42,1.88 25.44,1.86 25.46,1.84 25.48,1.82 25.48,0.08 31.52,0.08 31.52,1.82 31.54,1.84
ALERT  (via drill 0.3)
  Top 0.152: U3.5 17.57,31.02 v18.16,31.02 | v24.16,19.51 24.16,18.17 25.54,16.79 U1.P$J24
  Bottom 0.152: v18.16,31.02 18.16,30.84 17.73,30.41 17.73,28.42 24.16,21.99 v24.16,19.51
D+
  Top 0.254: U1.P$AD6 31.94,23.03 31.12,23.85 22.69,23.85 22.43,24.11 D3.4
D-
  Top 0.254: D3.6 24.76,24.36 25.31,24.36 25.43,24.47 25.88,24.47 25.95,24.41 25.95,24.34 26.01,24.27 26.45,24.27 26.52,24.34 26.52,24.41 26.58,24.47 27.03,24.47 27.09,24.41 27.09,24.34 27.15,24.27 27.6,24.27 27.66,24.34 27.66,24.41 27.72,24.47 28.17,24.47 28.23,24.41 28.23,24.34 28.3,24.27 28.74,24.27 28.8,24.34 28.8,24.41 28.87,24.47 29.31,24.47 29.38,24.41 29.38,24.34 29.44,24.27 29.88,24.27 29.95,24.34 29.95,24.41 30.01,24.47 30.45,24.47 30.52,24.41 30.52,24.31 30.58,24.25 31.03,24.25 31.14,24.36 31.39,24.36 31.55,24.2 31.71,24.2 32.03,23.88 32.03,23.72 32.44,23.31 32.44,23.09 32.33,22.97 32.33,22.52 32.39,22.45 32.48,22.45 32.54,22.39 32.54,21.95 32.44,21.84 U1.P$AD4
DEC4_6  (via drill 0.2)
  Top 0.152: U1.P$B5 32.17,14.77 32.17,12.91 C15.1 32.18,12.58 32.18,12.12 C16.1 C10.1 31.81,10.79 32.58,10.79 L3.2
  Bottom 0.152: U1.P$E24 26.94,15.44 29.46,12.92 30.46,12.92 32.19,14.65 U1.P$B5
  other vias: 26.94,15.79 32.19,14.79
DN
  Top 0.152: J4.A7 22.75,28.42 22.98,28.19 23.54,28.19 23.77,28.42 | 23.77,28.42 23.77,28.95 J4.B7 | D3.1 24.33,27.86 23.77,28.42
DP
  Top 0.152: J4.A6 23.25,29.51 23,29.76 22.5,29.76 22.25,29.51 J4.B6 22.25,27.47 D3.3
EPD_3V3
  Top 0.305: C1_EP_DR.1 17.98,20.16 EPD_C5.2 19.94,19.45 19.98,19.49 DMG2305UX-7.3 L5.2 16.97,18.39 15.9,17.32 12.68,17.32 11.61,16.25 J1.15 J1.16
EPD_BUSY
  Top 0.152: J1.9 9.84,19.25 9.33,19.75 9.33,24.45 11.13,26.25 16.55,26.25 20.38,22.42 29.51,22.42 30.44,21.49 U1.P$AD12
EPD_CS  (via drill 0.2)
  Top 0.152: J1.12 9.72,17.75 8.9,16.93 8.9,8.89 12.17,5.62 24.38,5.62 v26.15,7.39 | v27.68,8.5 28.05,8.87 37.34,8.87 38.15,9.68 38.15,13.18 35.19,16.14 33.37,16.14 32.94,16.57 U1.P$K2
  Bottom 0.152: v26.15,7.39 26.57,7.39 v27.68,8.5
EPD_DC
  Top 0.152: J1.11 10.03,18.25 8.76,19.52 8.76,24.69 10.88,26.81 16.81,26.81 20.63,22.99 30.22,22.99 31.09,22.12 31.09,20.94 U1.P$AD10
EPD_RST  (via drill 0.2)
  Top 0.152: J1.10 9.93,18.75 9.05,19.63 9.05,24.57 11.01,26.53 16.68,26.53 20.51,22.7 29.9,22.7 v30.65,21.95
  Bottom 0.152: U1.P$AC11 30.69,21.91
  Bottom 0.254: 30.69,21.91 v30.65,21.95
  other vias: 30.69,20.29
GDR  (via drill 0.2)
  Top 0.152: R2_EP_DR.2 10.97,22.75 J1.2 9.8,22.75 v9.76,22.79 | v15.97,16.75 Q3.1
  Bottom 0.152: v15.97,16.75 v15.97,16.76 9.94,22.79 v9.76,22.79
GND  (via drill 0.2, 0.3)  (8 unrouted)
  Top 0.102: 39.13,3.7 39.13,4.82 | 39.13,4.82 39.13,4.87 | 39.13,4.82 arc-165 39.8,4.91 39.8,4.82 | 39.8,3.7 39.8,4.82 | 39.8,4.82 arc-165 40.47,4.91 40.47,3.7 | 40.69,3.7 40.69,4.61 | 40.69,4.77 40.69,4.96 | 40.92,3.7 40.92,4.33 | 40.92,4.96 40.92,4.33 | 40.92,4.33 41.04,4.33 arc-90 41.3,4.07 41.3,3.7 | 41.5,4.33 41.68,4.33 arc-90 41.9,4.11 41.9,3.7 41.69,3.7 arc-90 41.49,3.9 arc-90 41.7,4.11 41.86,4.11 | 42.1,3.7 42.1,4.61 | 42.1,4.77 42.1,4.96 | 42.52,5.12 42.52,5.31 arc-90 42.66,5.45 43.82,5.45 42.52,3.75 43.7,3.75 arc-90 43.84,3.62 arc-90 43.71,3.49 38.51,3.49
  Top 0.152: R9.1 9.6,33.14 v9.57,33.12 | C22.2 v24.66,10.9 | v25.38,10.83 C4.2 26.05,10.12 v26.11,10.18 | C3.2 24.02,11.07 v24.03,11.09 | C29.2 35.47,6.39 | U1.P$74 U1.P$84
  Top 0.2: IC9.C1 IC9.B1 | X1.2 26.91,11.93 25.77,13.07 X1.4 25.66,13.9 v25.8,14.04 | 27.62,11.43 27.79,11.25 27.85,11.25
  Top 0.254: IC2.B1 v39.66,33.18 | C15.2 31.31,13.09 31.83,13.61 31.83,14.51 31.69,14.65 U1.P$B7 | C31.2 19.9,4.39 v19.47,4.82 | IC1.D2 10,30.58
  Top 0.305: IC9.C1 IC9.C2 IC9.C3 | J5.3 J5.5 40.44,24.73 v40.44,26.52 | EPD_C9.1 EPD_C8.1 EPD_C7.1 EPD_C6.1 v13.48,16.73 | EPD_C9.1 EPD_C10.1 | EPD_C10.1 EPD_C11.1 | EPD_C11.1 EPD_C12.1 v13.47,9.28 13.47,8.52 D4.1 | IC3.8 IC3.9 40.49,15.71 v40.49,15.38 | U1.P$F23 28.09,16.04 U1.P$78 | U1.P$B7 31.69,15.44 U1.P$75 | SW_UP.1 v14.57,3.97 v14.58,3.98 | J1.17 11.05,15.25 11.46,15.65 v11.46,15.7 | J1.8 11.15,19.75 v11.53,19.37 | C5.2 35.07,14.79 v35.07,14.67 | R3.2 37.89,15.18 v37.89,15.98 | C39.2 8.24,27.12 9.03,27.91 v9.05,27.91 | C1_EP_DR.2 15.56,20.27 v15.53,20.24 15.48,20.19 R_TYPE_SEL.1 | v39.66,33.18 v39.67,33.19 | C15.2 31.31,11.75 C16.2 | C16.2 31.24,11.67 C10.2 30.98,10.85 30.66,11.18 v30.66,11.32 31.02,11.68 C16.2 | SW_ENT.1 24.4,4.54 26.03,6.17 v27.99,6.17 | v36.56,6.34 36.51,6.39 35.47,6.39 | SW_DN.1 v36.54,3.97 v36.55,3.98 | J1.MP2 v7.97,9.75 v7.98,9.75 | J1.MP1 v7.97,24.89 v7.97,24.9 | C33.2 4.25,33.36 v4.77,33.88 4.81,33.84 4.81,33.81 5.15,33.47 C25.2 | 10,30.58 9.71,30.87 v9.49,30.87 | U3.4 17.26,28.93 17.63,28.56 17.69,28.56 J4.SH4 | TP_GND.TP 29.05,31.28 J4.SH3 27.22,29.45 27.22,28.43 26.18,27.38 R1_USB.1 | IC2.B3 39.66,31.53 v38.99,30.86 | C20.2 34.45,22.86 v34.43,22.88 | C17.1 37.12,11.37 v37.12,12.06 37.12,12.71 C18.1 | R2_EP_DR.1 14,24.1 v14.21,24.31 14.21,24.06 14.93,23.34 TP_BAT_GND.TP | v27.85,11.17 27.55,11.17 27.37,10.98 C1.2 27.37,11.68 X1.2 27.85,11.19 v27.85,11.17 | 27.85,11.25 v27.85,11.17 | C13.2 28.94,12.86 v28.94,12.15 28.94,11.96 28.61,11.63 C2.2 | EPD_C11.1 14.34,11.38 v14.37,11.41 | EPD_C10.1 14.33,12.32 v14.38,12.27 | EPD_C9.1 14.05,13.26 v14.37,13.58
  Route2 0.152: 9.84,30.8 9.84,31.31 10.19,31.66
  Route2 0.305: 38.76,11.32 v30.66,11.32 30.51,11.17 v27.85,11.17 25.34,11.17 23.95,9.78 | v4.77,33.88 5.13,33.52 5.13,33.13 | v37.12,12.06 37.12,12.15 37.09,12.18 37.09,12.76
  other vias: 23.98,13.58 23.08,13.16 24,11.67 24.2,14.79 23.16,15.07 24.65,15.26 24.08,15.91 25.09,15.73 25.05,16.62 23.96,12.92 23.07,12.5 23.97,12.28 23.08,11.86 24.99,9.15 28.96,6.18 23.07,13.79 23.94,14.2 23.66,15.48 23.06,14.45 24.5,16.31 23.08,11.24 23,10.54 24.19,9.15 23.33,9.13 22.89,9.83 28.47,7.11
  pour Route2: 31.56,1.86 31.58,1.88 36.42,1.88 36.44,1.86 36.46,1.84 36.48,1.82 36.48,0.08 39,0.08 39.78,0.12 40.54,0.25 41.29,0.46 42,0.76 42.68,1.14 43.32,1.59 43.9,2.1 44.41,2.68 44.86,3.32 45.24,4 45.54,4.71 45.75,5.46 45.88,6.22 45.92,7 45.92,28 45.88,28.78 45.75,29.54 45.54,30.29 45.24,31 44.86,31.68 44.41,32.32 43.9,32.9 43.32,33.41 42.68,33.86 42,34.24 41.29,34.54 40.54,34.75 39.78,34.88 39,34.92 7,34.92 6.22,34.88 5.46,34.75 4.71,34.54 4,34.24 3.32,33.86 2.68,33.41 2.1,32.9 1.59,32.32 1.14,31.68 0.76,31 0.46,30.29 0.25,29.54 0.12,28.78 0.08,28 0.08,24.48 7.02,24.48 7.04,24.46 7.06,24.44 7.08,24.42 7.08,10.58 7.06,10.56 7.04,10.54 7.02,10.52 0.08,10.52 0.08,7 0.12,6.22 0.25,5.46 0.46,4.71 0.76,4 1.14,3.32 1.59,2.68 2.1,2.1 2.68,1.59 3.32,1.14 4,0.76 4.71,0.46 5.46,0.25 6.22,0.12 7,0.08 9.52,0.08 9.52,1.82 9.54,1.84 9.56,1.86 9.58,1.88 14.42,1.88 14.44,1.86 14.46,1.84 14.48,1.82 14.48,0.08 20.52,0.08 20.52,1.82 20.54,1.84 20.56,1.86 20.58,1.88 25.42,1.88 25.44,1.86 25.46,1.84 25.48,1.82 25.48,0.08 31.52,0.08 31.52,1.82 31.54,1.84
  pour Top: 31.56,1.86 31.58,1.88 36.42,1.88 36.44,1.86 36.46,1.84 36.48,1.82 36.48,0.08 39,0.08 39.78,0.12 40.54,0.25 41.29,0.46 42,0.76 42.68,1.14 43.32,1.59 43.9,2.1 44.41,2.68 44.86,3.32 45.24,4 45.54,4.71 45.75,5.46 45.88,6.22 45.92,7 45.92,28 45.88,28.78 45.75,29.54 45.54,30.29 45.24,31 44.86,31.68 44.41,32.32 43.9,32.9 43.32,33.41 42.68,33.86 42,34.24 41.29,34.54 40.54,34.75 39.78,34.88 39,34.92 7,34.92 6.22,34.88 5.46,34.75 4.71,34.54 4,34.24 3.32,33.86 2.68,33.41 2.1,32.9 1.59,32.32 1.14,31.68 0.76,31 0.46,30.29 0.25,29.54 0.12,28.78 0.08,28 0.08,24.48 7.02,24.48 7.04,24.46 7.06,24.44 7.08,24.42 7.08,10.58 7.06,10.56 7.04,10.54 7.02,10.52 0.08,10.52 0.08,7 0.12,6.22 0.25,5.46 0.46,4.71 0.76,4 1.14,3.32 1.59,2.68 2.1,2.1 2.68,1.59 3.32,1.14 4,0.76 4.71,0.46 5.46,0.25 6.22,0.12 7,0.08 9.52,0.08 9.52,1.82 9.54,1.84 9.56,1.86 9.58,1.88 14.42,1.88 14.44,1.86 14.46,1.84 14.48,1.82 14.48,0.08 20.52,0.08 20.52,1.82 20.54,1.84 20.56,1.86 20.58,1.88 25.42,1.88 25.44,1.86 25.46,1.84 25.48,1.82 25.48,0.08 31.52,0.08 31.52,1.82 31.54,1.84
HAPTIC_EN
  Top 0.152: IC2.A1 40.57,33.05 42.67,33.05 44.13,31.59 44.13,29.24 44.75,28.62 44.75,19.21 43.95,18.41 35.98,18.41 34.77,19.62 34.29,19.62 33.46,18.79 U1.P$U1
IMU_INT1
  Top 0.152: IC3.5 42.22,14.92 42.95,15.65 42.95,16.12 41.26,17.81 33.58,17.81 33.56,17.79 U1.P$N1
IMU_INT2  (via drill 0.2)
  Top 0.152: v42.03,15.39 41.3,15.39 IC3.6
  Bottom 0.152: U1.P$P2 33.34,18.04 34.62,16.76 41.89,16.76 42.65,16 42.65,15.82 42.22,15.39 v42.03,15.39
  other vias: 32.94,18.04
LX1
  Top 0.152: IC9.B2 IC9.B3 5.49,30.32 4.14,28.97 L7.1
LX2
  Top 0.152: IC9.D2 IC9.D3 4.28,31.12 L7.2
MOSI  (via drill 0.2)
  Top 0.152: J1.14 10.14,16.75 9.46,16.07 9.46,9.13 12.41,6.18 23.76,6.18 25.06,7.48 v25.06,8.41 | v30.15,13.6 v30.16,13.59 30.16,12.45 27.27,9.56 v26.58,9.56
  Bottom 0.152: v30.15,13.6 30.15,14.75 | v26.58,9.56 26.4,9.56 25.25,8.41 v25.06,8.41
  Bottom 0.254: 30.15,14.75 U1.P$B13
  other vias: 30.19,14.79
N$1
  Top 0.152: L2.2 33.45,12.05 33.38,12.05 L3.1
N$2  (via drill 0.2)
  Top 0.152: IC9.D1 v8.65,31.12 | v11.98,34.31 12.04,34.25 R4.1
  Bottom 0.152: v8.65,31.12 8.65,31.93 11.03,34.31 v11.98,34.31
N$3
  Top 0.152: C32.1 41.45,32.14 IC2.A2
N$4
  Top 0.152: IC9.E1 7.76,31.54 R2.1
N$6
  Top 0.152: IC3.1 R3.1
N$7
  Top 0.152: U1.P$C1 C5.1
N$8
  Top 0.152: IC1.D1 R9.2
N$9
  Top 0.152: D2.1 D4.2 C2-EP-DR.1
N$10
  Top 0.152: EPD_C6.2 11.17,14.75 J1.18
N$11
  Top 0.152: SJ1.2 13.05,19.39 12.38,20.05 R_TYPE_SEL.2 12.47,20.28 12.47,20.64 14,20.64 14.5,21.14 14.5,22.89 13.98,23.41 R1_EP_DR.1
N$12
  Top 0.152: J4.A5 24.25,28.39 24.45,28.2 25.26,28.2 R1_USB.2
N$14
  Top 0.152: EPD_C2.2 11.63,21.8 10.68,21.8 J1.4
N$15
  Top 0.152: J1.5 12.01,21.25 EPD_C1.2
N$16
  Top 0.152: R2_USB.1 J4.B5
N$18
  Top 0.152: EPD_C7.2 11.6,14.25 J1.19
N$19
  Top 0.152: C2-EP-DR.2 16.46,12.28 | 16.46,12.28 16.46,12.39 Q3.3 | 16.46,12.28 17.99,13.81 L5.1 20.73,13.81 21.75,12.79 D5.2
N$20
  Top 0.152: U1.P$AC5 32.59,20.29 32.71,20.41 33.96,20.41 C20.1
N$21
  Top 0.152: EPD_C8.2 12.42,14.19 11.98,13.75 J1.20
N$22
  Top 0.152: EPD_C12.2 11.17,11.75 J1.24
N$24
  Top 0.152: J1.22 11.97,12.75 12.4,12.32 EPD_C10.2
N$40
  Top 0.152: L2.1 33.59,13.01 32.69,13.91 U1.P$B3
N$43
  Top 0.152: U1.P$A18 28.94,13.41 C13.1
N$58
  Top 0.152: C9.1 26.37,17.79 U1.P$N24
N$59
  Top 0.152: C11.1 27.21,15.31 U1.P$D23
N$60
  Top 0.152: X1.3 27.16,13.12 27.2,13.12 27.27,13.18 | U1.P$A23 27.44,13.42 27.24,13.22 27.27,13.18 | C2.1 27.91,12.28 27.27,13.18
N$61
  Top 0.152: U1.P$B24 25.63,14.79 24.91,14.07 24.91,12.59 25.57,11.93 X1.1 26.83,10.76 C1.1
N$62
  Top 0.152: L1.1 23.48,10.38 C3.1 23.52,10.43 23.52,14.76 24.97,16.21 27.04,16.21 27.37,16.54 U1.P$H23
N$63
  Top 0.152: L1.2 24.08,9.61 C22.1 C4.1 25.39,9.59 25.39,9.37 28.52,6.24 ANT1.1 28.21,4.27 27.81,4.67
OUT+
  Top 0.152: IC2.A3 41.72,31.64 TP_OP.TP
OUT-
  Top 0.152: TP_ON.TP 37.79,31.64 IC2.C3
P0.00/XL1
  Top 0.152: U1.P$D2 33.06,15.42 33.06,14.38 35.53,11.91 X2.2 35.89,10.84 C17.2
P0.00/XL2
  Top 0.152: U1.P$F2 33.19,15.79 34.85,15.79 35.53,15.11 X2.1 35.99,13.23 C18.2
P0.13  (via drill 0.2)
  Top 0.152: v10.59,5.07 v10.6,5.06 SW_UP.2 R5.1 9.66,3.76 8.85,2.94 C30.1 | v25.71,23.38 30.25,23.38 31.44,22.19 U1.P$AD8
  Bottom 0.152: v10.59,5.07 25.71,20.19 v25.71,23.38
P0.14  (via drill 0.2)
  Top 0.152: v28.15,7.93 28.8,8.58 37.55,8.58 41.46,12.49 41.46,13.75 43.25,15.54 43.25,16.24 41.38,18.11 35.51,18.11 v34.44,19.18 | C31.1 20.68,3.82 R8.1 20.69,3.82 SW_ENT.2 21.6,4.41 22.5,5.31 24.52,5.31 26.15,6.94 v26.82,6.94
  Bottom 0.152: U1.P$AC9 33.33,20.29 v34.44,19.18 | v28.15,7.93 28.03,7.93 27.04,6.94 v26.82,6.94
  other vias: 31.19,20.29
P1.01
  Top 0.152: U1.P$Y23 27.44,20.34 26.93,20.85 R_PWR_EPD.1 20.93,21.38 DMG2305UX-7.1
P1.02  (via drill 0.2)
  Top 0.152: C29.1 34.59,6.36 R7.1 34.55,5.56 v33.64,5.56 32.6,4.52 SW_DN.2 32.6,3.99
  Bottom 0.152: U1.P$W24 25.27,19.29 20.26,14.28 20.26,8.8 22.5,6.56 32.64,6.56 v33.64,5.56
  other vias: 26.94,19.29
PMIC_INT  (via drill 0.2)
  Top 0.152: IC1.A1 12.04,31.49 v12.2,31.49
  Bottom 0.152: v12.2,31.49 32.1,31.49 35.67,27.92 35.67,19.07 35.14,18.54 U1.P$T2
  other vias: 32.94,18.54
PREVGH
  Top 0.152: EPD_C9.2 J1.21 10.22,13.25 9.74,12.77 9.74,9.27 12.54,6.47 21.82,6.47 22.61,7.26 22.61,8.86 21.73,9.74 18.83,9.74 18.25,10.32 D5.1
PREVGL
  Top 0.152: EPD_C11.2 11.6,12.25 J1.23 10.27,12.25 10.02,12 10.02,9.39 12.66,6.75 21.33,6.75 21.74,7.16 D2.2
RESE  (via drill 0.2)
  Top 0.152: R1_EP_DR.2 11.18,22.27 10.64,22.27 J1.3 9.8,22.25 v9.76,22.21 | v14.68,16.75 Q3.2
  Bottom 0.152: v14.68,16.75 14.68,17.43 9.9,22.21 v9.76,22.21
RESET  (via drill 0.2)
  Top 0.152: J5.6 39.5,24.1 38.54,25.05 36.97,25.05 35.05,26.97 v35.05,27.39 33.88,28.56 TP_RESET.TP
  Bottom 0.152: U1.P$AC13 30.19,22.08 35.05,26.94 v35.05,27.39
  other vias: 30.19,20.29
SCK  (via drill 0.2)
  Top 0.152: J1.13 9.73,17.25 9.18,16.7 9.18,9.01 12.29,5.9 23.95,5.9 25.58,7.53 v25.58,7.87 | U1.P$A12 30.54,14.19 30.54,12.42 v27.14,9.02 v27.14,9.01
  Bottom 0.152: v27.14,9.01 26.72,9.01 v25.58,7.87
SCL  (via drill 0.2)
  Top 0.152: R17.2 12.59,32.37 12.41,32.19 11.26,32.19 11.13,32.06 IC1.B1 | R17.2 R4.2 12.71,33.7 TP_SCL.TP | R17.2 12.72,32.45 15.95,32.45 16.26,32.14 U3.7 16.26,32.14 16.68,32.56 39.08,32.56 IC2.C1 39.16,33.67 42.45,33.67 44.43,31.69 44.43,29.37 45.05,28.75 45.05,14.51 44.2,13.65 v43.33,13.65 | IC3.12 v38.95,14.92
  Bottom 0.152: U1.P$M2 34.03,16.45 35.83,16.45 37.36,14.92 v38.95,14.92 v38.95,14.93 42.05,14.93 v43.33,13.65
  other vias: 32.94,17.54
SDA  (via drill 0.2)
  Top 0.152: R18.2 R2.2 10.44,33.78 10.75,33.47 10.75,33.17 | 10.75,33.17 10.75,31 IC1.C1 | 10.75,33.17 v11.19,33.61 | U3.8 15.09,32 v13.12,32 13.97,31.15 TP_SDA.TP | v34.96,17.37 34.88,17.29 U1.P$L1 34.47,17.29 37.8,13.96 40.08,13.96 40.25,14.13 IC3.2
  Top 0.254: IC2.B2 39.64,32.16 v39.64,32.19
  Bottom 0.152: v11.19,33.61 11.64,33.16 11.96,33.16 v13.12,32 13.31,32.19 v39.64,32.19 39.64,30.58 35.99,26.93 35.99,18.4 v34.96,17.37
SWDCLK  (via drill 0.2)
  Top 0.152: J5.4 38.88,21.9 37.02,21.9 36.21,22.71 36.21,25.25 v34.12,27.34 31.76,29.7 TP_SWDCLK.TP
  Bottom 0.152: U1.P$AA24 26.72,19.79 26.04,20.47 26.04,22.15 31.23,27.34 v34.12,27.34
  other vias: 26.94,19.79
SWDIO  (via drill 0.2)
  Top 0.152: J5.2 39.46,21.21 39.46,19.5 38.73,18.77 36.98,18.77 35.68,20.07 35.68,25.23 34.16,26.75 v33.54,26.75 32.36,27.93 TP_SWDIO.TP
  Bottom 0.152: U1.P$AC24 26.94,22.25 31.44,26.75 v33.54,26.75
  other vias: 26.94,20.29
SWO  (via drill 0.2)
  Top 0.152: U1.P$AD22 27.94,20.86 v28.55,21.47 | TP_SWO.TP 32.62,25.85 v32.62,25.29
  Bottom 0.152: v32.62,25.29 28.8,21.47 v28.55,21.47
VBAT  (via drill 0.2)
  Top 0.254: v11.03,28.59 11.12,28.5 C27.1 C37.1 13.07,28.38 15.78,28.38 16.26,28.86 U3.2 | IC1.C2 10.73,30.07 10.59,29.93 9.57,29.93 v9.49,30.01
  Top 0.305: U3.2 U3.3 | TP_VBAT.TP 2.34,25.61 8.25,25.61 v9.51,26.87
  Bottom 0.305: v9.49,30.01 9.49,29.03 9.93,28.59 v11.03,28.59 9.51,27.07 v9.51,26.87
VBUS
  Top 0.254: C43.1 20.5,25.91 C42.1 23.14,25.91 23.38,25.67 D3.5 | IC1.A2 11.53,29.59 11.05,29.11 10.86,29.11 10.55,28.8 10.55,28.39 11.28,27.66 C38.1 19.62,27.66 C21.1
  Top 0.305: J4.A4_B9 25.4,29.52 24.77,30.14 21.23,30.14 20.6,29.51 J4.A9_B4 20.5,28.88 20.5,26.99 C21.1 C43.1 | D3.5 23.38,25.63 23.42,25.67 28.05,25.67 28.8,24.92 31.58,24.92 32.95,23.55 32.95,20.81 U1.P$AD2
VREG
  Top 0.254: IC9.A1 8.13,29.53 10.82,29.53 11.13,29.84 IC1.B2 | C24.2 6.73,28.26 C23.1 5.66,28.26 4.37,26.97 TP_VREG.TP
  Top 0.305: IC9.A3 IC9.A2 IC9.A1 7.74,28.31 C39.1 C24.2
(copper drawn outside any net)
  shapes: Route15 area x1, Top area x2